# EAGLE board Sensor Board B (EAGLE 8.2.2)
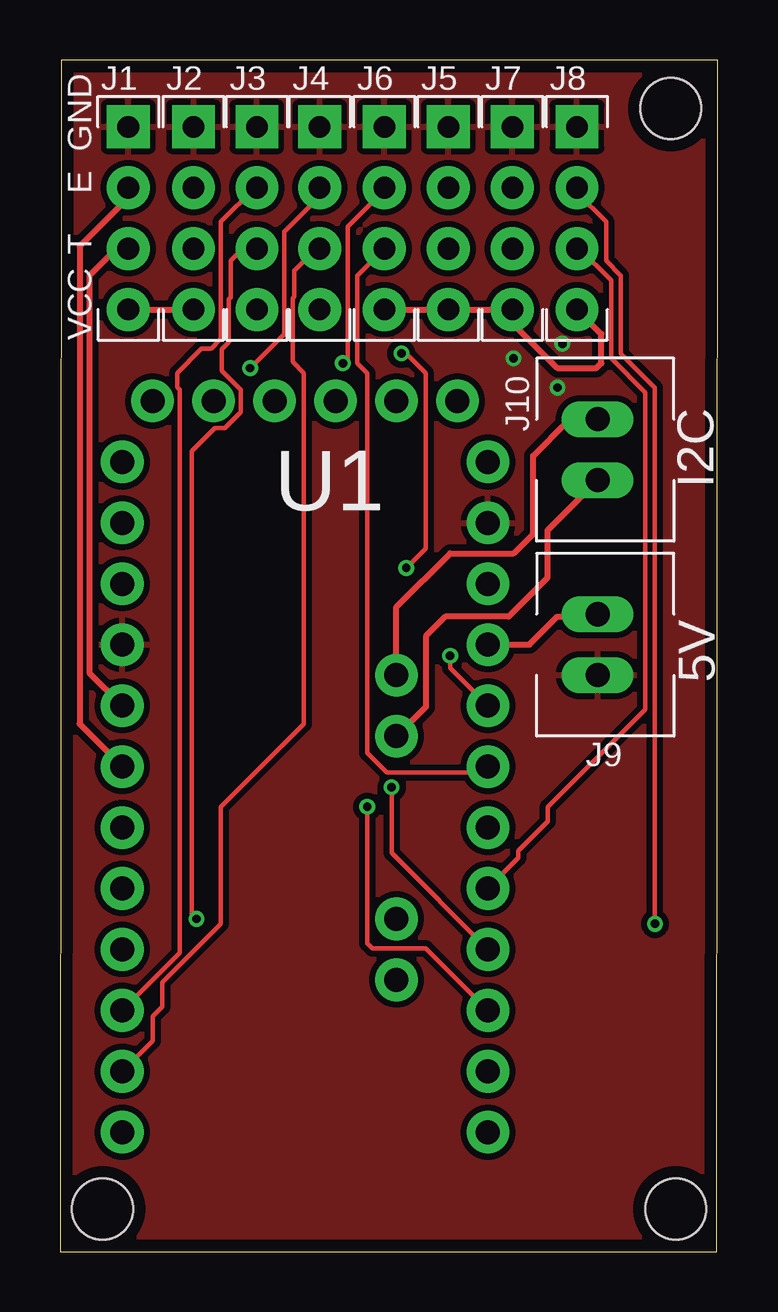
[diagram p0: board, top side]
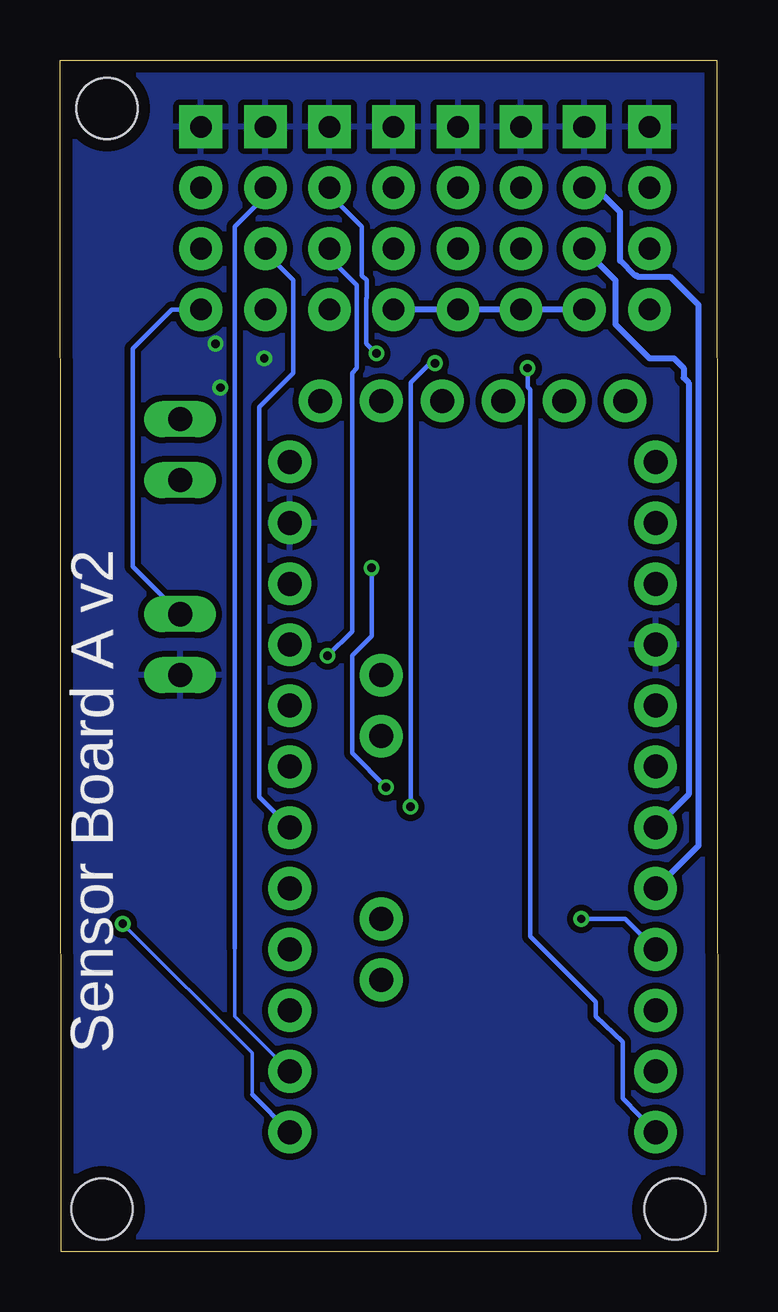
[diagram p1: board, bottom side, seen from below]

Size 27.41 x 49.67 mm. Coordinates in mm from the lower left corner, seen from the top.
Outline: 0,0 27.36,0 27.41,49.67 0.05,49.67 0,0
Copper layers (1*16): Top 0.035mm / dielectric 1.6mm / Bottom 0.035mm
Design rules "Elecrow_2-layer_PCB_eagle_rule": minimum track width 6mil, minimum drill 12mil, track to track 6mil, track to pad 6mil, pad to pad 6mil, via to via 8mil, smd to smd 0mil, copper to edge 20mil, drill to drill 10mil, minimum pad ring 6mil, minimum via ring 6mil, stop-mask expansion 0mil, vias tented up to drill 100mil, thermal gap 10mil
Holes 2.54 mm at 25.65,1.78 25.45,47.65 1.78,1.78

## Footprints (pad centres in the part's own frame; a part is rotated, then mirrored left to right if it is on the bottom)
HC-SR04_FOOTPRINT = drill 0.9 pad 1.778: ECHO 0,1.27; TRIG 0,-1.27; VCC 0,-3.81 | drill 0.9 pad 1.778 square: GND 0,3.81
XH_CONNECTOR = drill 1.001 long: 1 -1.27,0; 2 1.27,0
PRO-MINI-2 = drill 1 pad 1.778: A0 6.35,2.54; A1 6.35,0; A2 6.35,-2.54; A3 6.35,-5.08; A4 2.54,1.27; A5 2.54,3.81; A6 2.54,-8.89; A7 2.54,-6.35; D2 -8.89,2.54; D3 -8.89,0; D4 -8.89,-2.54; D5 -8.89,-5.08; D6 -8.89,-7.62; D7 -8.89,-10.16; D8 -8.89,-12.7; D9 -8.89,-15.24; D10 6.35,-15.24; D11 6.35,-12.7; D12 6.35,-10.16; D13 6.35,-7.62; DTR 5.08,15.24; GND 6.35,10.16; GND1 -8.89,5.08; GND2 -7.62,15.24; GND3 -5.08,15.24; RAW 6.35,12.7; RST 6.35,7.62; RST1 -8.89,7.62; RX1 -8.89,10.16; RX1-1 0,15.24; TX0 -8.89,12.7; TX0-1 2.54,15.24; VCC 6.35,5.08; VCC1 -2.54,15.24

## Placement (x,y rotation side)
J1  HC-SR04  [HC-SR04_FOOTPRINT]  2.84,43.08 0 top
J2  HC-SR04  [HC-SR04_FOOTPRINT]  5.56,43.08 0 top
J3  HC-SR04  [HC-SR04_FOOTPRINT]  8.2,43.08 0 top
J4  HC-SR04  [HC-SR04_FOOTPRINT]  10.82,43.08 0 top
J5  HC-SR04  [HC-SR04_FOOTPRINT]  16.18,43.08 0 top
J6  HC-SR04  [HC-SR04_FOOTPRINT]  13.51,43.08 0 top
J7  HC-SR04  [HC-SR04_FOOTPRINT]  18.85,43.08 0 top
J8  HC-SR04  [HC-SR04_FOOTPRINT]  21.54,43.08 0 top
J9  POWER_CONNECTOR  [XH_CONNECTOR]  22.4,25.3 270 top
J10  I2C_CONNECTOR  [XH_CONNECTOR]  22.4,33.43 270 top
U1  PRO-MINI-2  [PRO-MINI-2]  11.48,20.22 0 top

## Library data of the parts
J1-J8 = Ultrasonic Sensor HC-SR04
J9 J10 = thanics_robotics
U1 = Arduino-clone

## Nets
+5V: J1.VCC J2.VCC J3.VCC J4.VCC J5.VCC J6.VCC J7.VCC J8.VCC J9.1 U1.VCC
ECHO1: J1.ECHO U1.D3
ECHO2: J2.ECHO U1.D5
ECHO3: J3.ECHO U1.D7
ECHO4: J4.ECHO U1.D9
ECHO5: J5.ECHO U1.D13
ECHO6: J6.ECHO U1.D12
ECHO7: J7.ECHO U1.D11
ECHO8: J8.ECHO U1.D10
GND: J1.GND J2.GND J3.GND J4.GND J5.GND J6.GND J7.GND J8.GND J9.2 U1.GND U1.GND1
SCL: J10.1 U1.A5
SDA: J10.2 U1.A4
TRIG1: J1.TRIG U1.D2
TRIG2: J2.TRIG U1.D4
TRIG3: J3.TRIG U1.D6
TRIG4: J4.TRIG U1.D8
TRIG5: J5.TRIG U1.A0
TRIG6: J6.TRIG U1.A1
TRIG7: J7.TRIG U1.A2
TRIG8: J8.TRIG U1.A3

## Tracks (layer width: path | path; a pad name or v marks a point on that pad's centre or on a via)
+5V
  Top 0.254: U1.VCC 19.56,25.3 20.73,26.47 22.3,26.47 J9.1 | J1.VCC J2.VCC | J6.VCC J5.VCC J7.VCC 18.85,38.71 20.73,36.83 22.35,36.83 22.55,37.03 22.55,38.25 J8.VCC
  Bottom 0.178: J8.VCC 22.76,39.27 24.38,37.64 24.38,28.55 J9.1
  Bottom 0.254: J2.VCC J3.VCC J4.VCC J6.VCC
ECHO1
  Top 0.254: J1.ECHO 2.84,43.94 0.81,41.91 0.81,22 U1.D3
ECHO2
  Bottom 0.254: U1.D5 0.81,16.92 0.81,39.47 1.98,40.64 3.33,40.64 3.38,40.69 3.45,40.69 4.06,41.3 4.06,43.33 4.88,44.15 5.36,44.15 J2.ECHO
ECHO3
  Top 0.178: J3.ECHO 8.13,44.35 6.71,42.93 6.71,38.05 6.3,37.64 5.89,37.64 4.88,36.63 4.88,36.04 4.99,35.93 4.99,12.46 U1.D7
ECHO4  (via drill 0.35)
  Top 0.178: J4.ECHO 10.82,43.99 9.35,42.52 9.35,38.25 v7.92,36.83
  Bottom 0.178: v7.92,36.83 7.92,36.04 7.81,35.93 7.81,13.14 5.08,10.41 5.08,9.8 3.96,8.74 3.96,6.4 U1.D9
ECHO5  (via drill 0.35)
  Top 0.178: v14.22,37.44 14.43,37.44 15.24,36.63 15.24,29.31 v14.43,28.5 | v13.82,19.35 13.82,16.61 U1.D13
  Bottom 0.178: J5.ECHO 16.18,44.07 14.83,42.72 14.83,40.69 14.63,40.49 14.63,39.75 14.64,39.74 14.64,37.86 v14.22,37.44 | v14.43,28.5 14.43,25.65 15.24,24.84 15.24,20.78 v13.82,19.35
ECHO6  (via drill 0.35)
  Top 0.178: J6.ECHO 13.51,44.25 11.99,42.72 11.99,37.24 v11.79,37.03 | v12.8,18.54 12.8,12.85 13,12.65 15.24,12.65 U1.D12
  Bottom 0.178: v11.79,37.03 11.99,37.03 12.8,36.22 v12.8,18.54
ECHO7
  Bottom 0.152: 20.12,12.65 20.12,9.8 U1.D11
  Bottom 0.178: J7.ECHO 18.85,43.99 20.12,42.72 20.12,12.65
ECHO8  (via drill 0.35)
  Top 0.178: J8.ECHO 21.54,44.15 22.76,42.93 22.76,41.3 23.37,40.69 23.37,37.44 24.79,36.02 v24.79,13.67
  Bottom 0.152: 19.41,6.55 19.41,8.28 v24.79,13.67
  Bottom 0.178: U1.D10 19.41,6.55
GND  (via drill 0.35)
  other vias: 18.9,37.24 20.73,36.02 20.93,37.85
  pour Bottom (isolate 0.254): 0.05,49.68 27.48,49.68 27.43,0 0,0
  pour Top (isolate 0.254): 0.05,49.68 27.48,49.68 27.43,0 0,0
SCL
  Top 0.254: U1.A5 14.02,26.87 16.26,29.11 18.9,29.11 19.71,29.92 19.71,33.17 21.13,34.59 22.3,34.59 J10.1
SDA
  Top 0.254: 14.12,21.49 U1.A4 15.24,22.71 15.24,25.65 16.05,26.47 18.69,26.47 20.32,28.09 20.32,30.07 J10.2
TRIG1
  Top 0.254: J1.TRIG 2.34,41.81 1.22,40.69 1.22,24.13 U1.D2
TRIG2
  Bottom 0.254: J2.TRIG 5.56,41.78 4.27,40.49 4.27,38.66 2.84,37.24 1.83,37.24 1.42,36.83 1.42,36.42 1.22,36.22 1.22,19.05 U1.D4
TRIG3  (via drill 0.35)
  Top 0.178: J3.TRIG 7.62,41.81 7.11,41.3 7.11,39.77 7.04,39.7 7.04,37.91 6.74,37.61 6.74,36.72 7.53,35.93 7.53,34.99 6.87,34.33 6.44,34.33 5.49,33.38 5.49,14.07 v5.69,13.87
  Bottom 0.178: v5.69,13.87 3.86,13.87 U1.D6
TRIG4
  Top 0.178: J4.TRIG 10.67,41.81 9.75,40.89 9.75,39.8 9.69,39.74 9.69,37.1 10.16,36.63 10.16,22 6.71,18.54 6.71,13.67 4.27,11.23 4.27,10.21 3.86,9.8 3.86,8.79 U1.D8
TRIG5  (via drill 0.35)
  Top 0.178: v16.26,24.84 16.26,24.33 U1.A0
  Bottom 0.178: J5.TRIG 16.18,41.43 15.04,40.28 15.04,36.83 15.24,36.63 15.24,25.86 v16.26,24.84
TRIG6
  Top 0.178: J6.TRIG 12.39,40.69 12.39,39.75 12.38,39.74 12.38,37.05 12.8,36.63 12.8,20.78 13.61,19.96 17.58,19.96 U1.A1
TRIG7
  Bottom 0.178: J7.TRIG 18.85,41.66 17.68,40.49 17.68,36.63 19.1,35.2 19.1,18.95 U1.A2
TRIG8
  Top 0.178: J8.TRIG 21.64,41.81 22.96,40.49 22.96,37.24 24.38,35.81 24.38,22.61 20.32,18.54 20.32,17.93 19.1,16.71 19.1,16.41 U1.A3

## Text on the board
tPlace: GND | E | T | VCC | J10 | I2C | U1 | 5V | J9
bNames: Sensor Board A v2